# Altium PCB ACS712 Breakout v11.PcbDoc
Units mil, origin at the board's own origin, x right, y up, seen from the top; angles counter-clockwise.
Board outline 850 x 600 mil, 2 copper layers (Top, Bottom), stack 61.811 mil thick; 5 components, 6 nets, 14 pads, 0 vias.
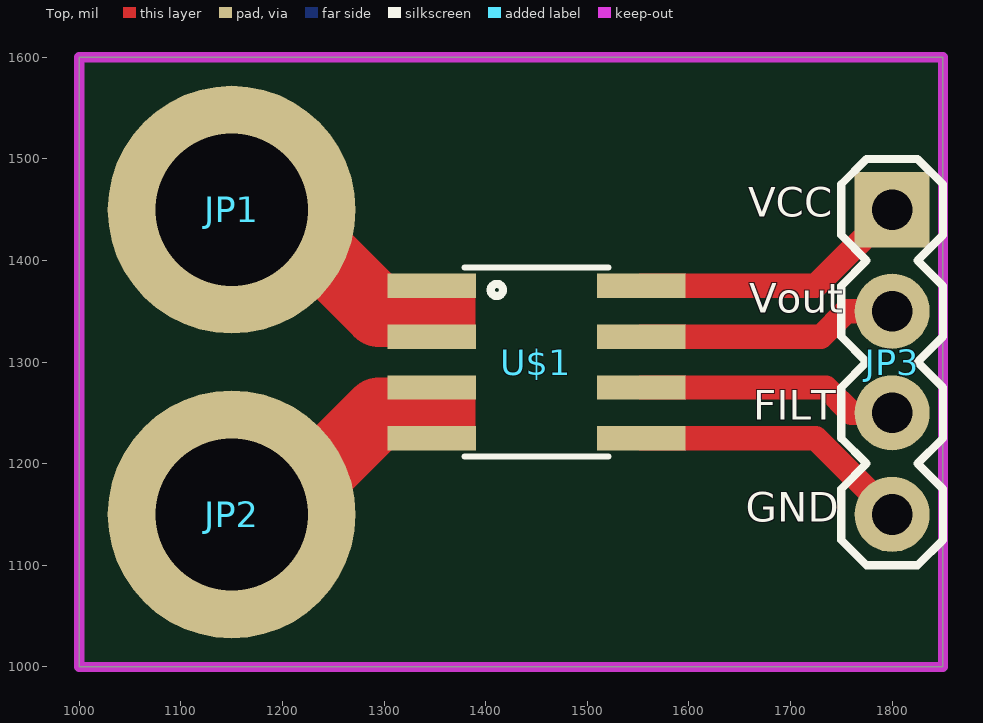
[diagram p0: Top view]
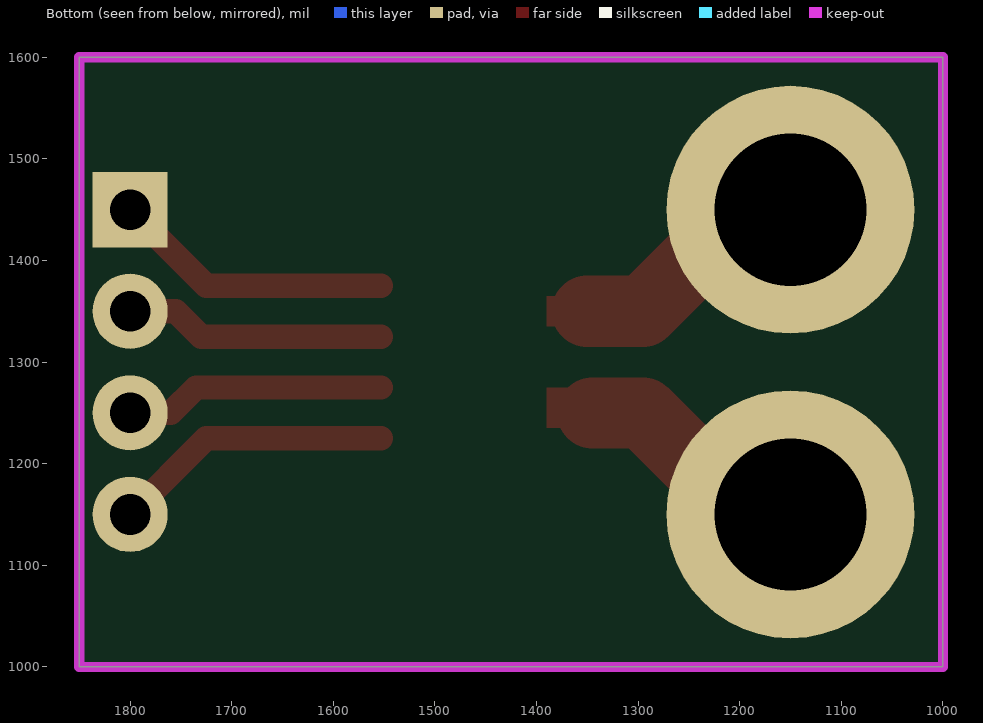
[diagram p1: Bottom view, seen from below]

## Layer stack, top to bottom
Top Solder: solder mask 0.4, Solder Resist, Dk 3.5
Top: signal copper 1.378
Dielectric 1: core 59.0551, FR-4, Dk 4.8
Bottom: signal copper 1.378
Bottom Solder: solder mask 0.4, Solder Resist, Dk 3.5

## Board outline
1000,1000 1000,1600 1850,1600 1850,1000

## Design rules (kind name [scope] priority, off if disabled: settings)
Clearance mdViaVia [IsVia vs IsVia] p1: gap=8
Clearance mdPadVia [IsPad vs IsVia] p2: gap=8
Clearance mdPadPad [IsPad vs IsPad] p3: gap=8
Clearance mdWireVia [(InLayerClass('Signal Layers') AND IsTrack) vs IsVia] p4: gap=8
Clearance mdWirePad [(InLayerClass('Signal Layers') AND IsTrack) vs IsPad] p5: gap=8
Clearance mdWireWire [(InLayerClass('Signal Layers') AND IsTrack) vs (InLayerClass('Signal Layers') AND IsTrack)] p6: gap=8
Clearance [All] p7: gap=8
HoleSize [All] p1: absolutevalues=TRUE maxlimit=100000 minlimit=20 maxpercent=80.000 minpercent=20.000
HoleToHoleClearance [All] p1: gap=8 allowstackedmicrovias=TRUE
PolygonConnect ThermalVias [IsVia] p1: connectstyle=Direct reliefconductorwidth=10 reliefentries=4 polygonreliefangle="90 Angle" airgapwidth=10
PolygonConnect [All] p2: connectstyle=Relief reliefconductorwidth=10 reliefentries=4 polygonreliefangle="90 Angle" airgapwidth=10
RoutingVias [All] p1: holewidth=28 width=50 viastyle="Through Hole" minholewidth=28 minwidth=50 maxholewidth=28 maxwidth=50
SilkToSilkClearance [All] p1 off: silktosilkclearance=10
SilkToSolderMaskClearance [IsPad] p1 off: minsilkscreentomaskgap=10 clearancetoexposedcopper=TRUE
SolderMaskExpansion [All] p1: expansion=4
UnpouredPolygon [All] p1: allowunpoured=FALSE
Width [All] p1: maxlimit=100000 minlimit=8 preferedwidth=10
25 further rules are at their usual default settings.

## Components (designator, comment, footprint, x,y, rotation, side; value= is the part's Value field where it differs from the comment)
JP1 "" SMTSO-256-ET 1150,1450 r0 top
JP2 "" SMTSO-256-ET 1150,1150 r0 top
JP3 "" 1X04 1800,1450 r270 top
U$1 "ACS712" SO08 1450,1300 r270 top
U$4 "" CREATIVE_COMMONS 1850,700 r0 top

## Footprints (in the part's own frame and the unit in brackets; to place one, negate y for a bottom-side part, rotate by r counter-clockwise, add the part's x,y. Pads: shape width x height; smd on the part's side, far side on the other; paste and mask are expansions set on the pad)
1X04 [mil] "1X04"
  rect 74x74 hole 40: 1(0,0)
  round 74 hole 40: 2(100,0) 3(200,0) 4(300,0)
  silkscreen extent -50,-50 350,50
CREATIVE_COMMONS [mil] "CREATIVE_COMMONS"
SMTSO-256-ET [mil] "SMTSO-256-ET"
  round 244 hole 150: P$1(0,0)
SO08 [mil] "SO08"
  rect 24x87 smd: 1(-75,-103) 2(-25,-103) 3(25,-103) 4(75,-103) 5(75,103) 6(25,103) 7(-25,103) 8(-75,103)
  silkscreen extent -93,-71 93,71

## Part data
JP1 JP2: library part SMTSO-256-ET
JP3: library part 1X04
U$1: library part SO08
U$4: library part CREATIVE_COMMONS

## Nets (pads, with @x,y where several pads share a name; then routed paths per layer and width w, separated by ;. In a path a pad name is that pad's centre, name@x,y a point inside that pad or via, vN(x,y) a via of type N, cw(c..) or ccw(c..) an arc to the next point about the centre after c; other vN are vias at no path point)
FILT: JP3.3 U$1.6 | length 257.4
  Top w24: U$1.6 1735,1275 1760,1250 JP3.3
GND: JP3.4 U$1.5 | length 278.1
  Top w24: U$1.5 1725,1225 JP3.4
N$1: JP1.P$1 U$1.1 U$1.2 | length 293.9
  Top w10: U$1.2 1347,1347 1350,1350 1347,1353 U$1.1
  Top w70: JP1.P$1 1195,1450 1295,1350 1350,1350
N$3: JP2.P$1 U$1.3 U$1.4 | length 288.1
  Top w10: U$1.4 1347,1248 1345,1250 1347,1252 U$1.3
  Top w70: JP2.P$1 1195,1150 1295,1250 1345,1250
VCC: JP3.1 U$1.8 | length 278.1
  Top w24: U$1.8 1725,1375 JP3.1
VOUT: JP3.2 U$1.7 | length 260.4
  Top w10: U$1.7@1550,1325 U$1.7
  Top w24: U$1.7 1730,1325 1755,1350 JP3.2

## Keep-outs
Keep-Out Layer:
  the board outline again, w10

## Other copper
Top:
  rectangle net N$3: 1305,1235 1390,1275
  rectangle net N$1: 1310,1335 1390,1365

## Silkscreen, mask and mechanical layers (free items; w line width, h text height)
Top Overlay:
  text "VCC" at 1658.29,1433.24 h49.6
  text "Vout" at 1659.3,1338.74 h49.6
  text "FILT" at 1663.25,1233.24 h49.6
  text "GND" at 1656.09,1133.24 h49.6
Dimension:
  the board outline again, w10